# Altium PCB PCBv2.PcbDoc (part 2 of 2)
Units mil, origin at the board's own origin, x right, y up, seen from the top; angles counter-clockwise.
Board outline 3700.79 x 5244.09 mil, 2 copper layers (Top Layer, Bottom Layer); 35 components, 39 nets, 108 pads, 2885 vias.
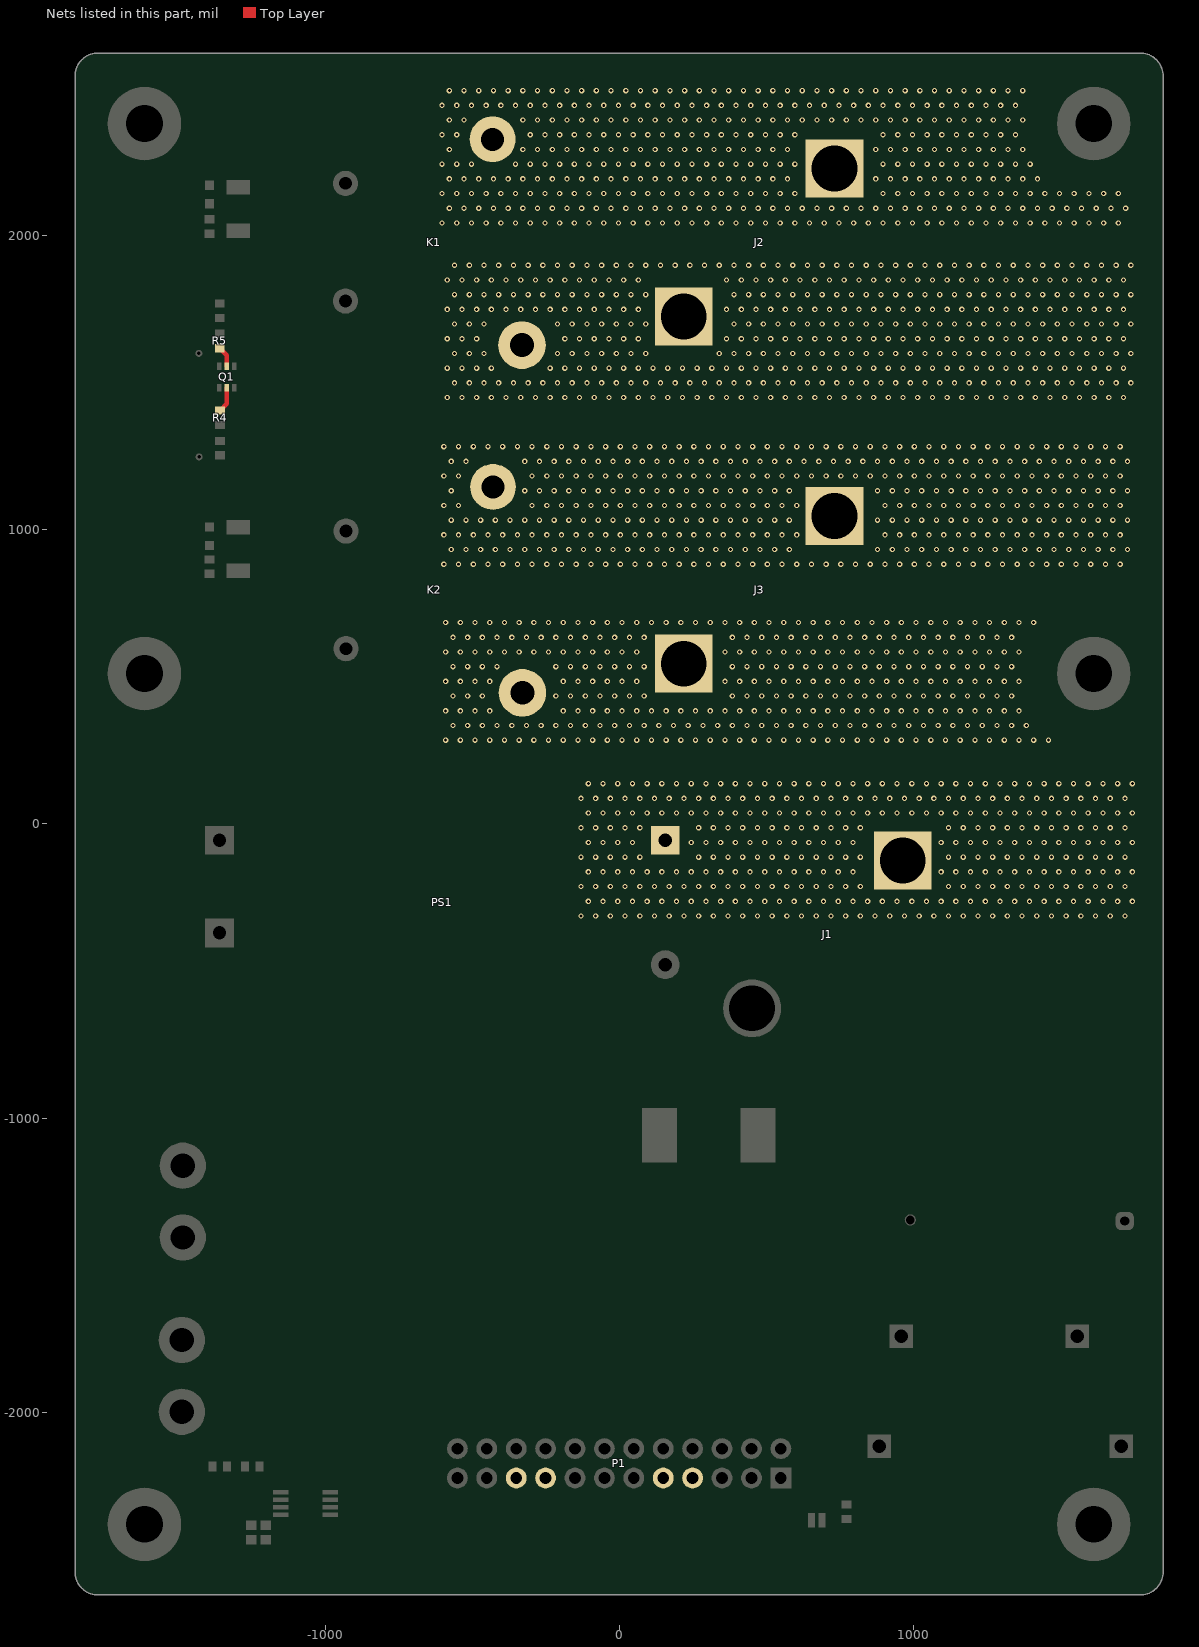
[diagram p2: the nets of this part, all layers, seen from the top]

## Via types
v1: diameter 18, hole 10, Top Layer to Bottom Layer, tented both sides, 2885 vias

## Nets (pads, with @x,y where several pads share a name; then routed paths per layer and width w, separated by ;. In a path a pad name is that pad's centre, name@x,y a point inside that pad or via, vN(x,y) a via of type N, cw(c..) or ccw(c..) an arc to the next point about the centre after c; other vN are vias at no path point) (continued)
NetJ1_2: J1.2 PS1.AC2
  other v1: -129.64,-312.84 -79.64,-312.84 -29.64,-312.84 20.36,-312.84 70.36,-312.84 120.36,-312.84 170.36,-312.84 220.36,-312.84 270.36,-312.84 320.36,-312.84 370.36,-312.84 420.36,-312.84 470.36,-312.84 520.36,-312.84 570.36,-312.84 620.36,-312.84 670.36,-312.84 720.36,-312.84 770.36,-312.84 820.36,-312.84 870.36,-312.84 920.36,-312.84 970.36,-312.84 1020.36,-312.84 1070.36,-312.84 1120.36,-312.84 1170.36,-312.84 1220.36,-312.84 1270.36,-312.84 1320.36,-312.84 1370.36,-312.84 1420.36,-312.84 1470.36,-312.84 1520.36,-312.84 1570.36,-312.84 1620.36,-312.84 1670.36,-312.84 1720.36,-312.84 -104.64,-262.84 -54.64,-262.84 -4.64,-262.84 45.36,-262.84 95.36,-262.84 145.36,-262.84 195.36,-262.84 245.36,-262.84 295.36,-262.84 345.36,-262.84 395.36,-262.84 445.36,-262.84 495.36,-262.84 545.36,-262.84 595.36,-262.84 645.36,-262.84 695.36,-262.84 745.36,-262.84 795.36,-262.84 845.36,-262.84 895.36,-262.84 945.36,-262.84 995.36,-262.84 1045.36,-262.84 1095.36,-262.84 1145.36,-262.84 1195.36,-262.84 1245.36,-262.84 1295.36,-262.84 1345.36,-262.84 1395.36,-262.84 1445.36,-262.84 1495.36,-262.84 1545.36,-262.84 1595.36,-262.84 1645.36,-262.84 1695.36,-262.84 1745.36,-262.84 -129.64,-212.84 -79.64,-212.84 -29.64,-212.84 20.36,-212.84 70.36,-212.84 120.36,-212.84 170.36,-212.84 220.36,-212.84 270.36,-212.84 320.36,-212.84 370.36,-212.84 420.36,-212.84 470.36,-212.84 520.36,-212.84 570.36,-212.84 620.36,-212.84 670.36,-212.84 720.36,-212.84 770.36,-212.84 820.36,-212.84 1120.36,-212.84 1170.36,-212.84 1220.36,-212.84 1270.36,-212.84 1320.36,-212.84 1370.36,-212.84 1420.36,-212.84 1470.36,-212.84 1520.36,-212.84 1570.36,-212.84 1620.36,-212.84 1670.36,-212.84 1720.36,-212.84 -104.64,-162.84 -54.64,-162.84 -4.64,-162.84 45.36,-162.84 95.36,-162.84 145.36,-162.84 195.36,-162.84 245.36,-162.84 295.36,-162.84 345.36,-162.84 395.36,-162.84 445.36,-162.84 495.36,-162.84 545.36,-162.84 595.36,-162.84 645.36,-162.84 695.36,-162.84 745.36,-162.84 795.36,-162.84 1095.36,-162.84 1145.36,-162.84 1195.36,-162.84 1245.36,-162.84 1295.36,-162.84 1345.36,-162.84 1395.36,-162.84 1445.36,-162.84 1495.36,-162.84 1545.36,-162.84 1595.36,-162.84 1645.36,-162.84 1695.36,-162.84 1745.36,-162.84 -129.64,-112.84 -79.64,-112.84 -29.64,-112.84 20.36,-112.84 70.36,-112.84 270.36,-112.84 320.36,-112.84 370.36,-112.84 420.36,-112.84 470.36,-112.84 520.36,-112.84 570.36,-112.84 620.36,-112.84 670.36,-112.84 720.36,-112.84 770.36,-112.84 820.36,-112.84 1120.36,-112.84 1170.36,-112.84 1220.36,-112.84 1270.36,-112.84 1320.36,-112.84 1370.36,-112.84 1420.36,-112.84 1470.36,-112.84 1520.36,-112.84 1570.36,-112.84 1620.36,-112.84 1670.36,-112.84 1720.36,-112.84 -104.64,-62.84 -54.64,-62.84 -4.64,-62.84 45.36,-62.84 245.36,-62.84 295.36,-62.84 345.36,-62.84 395.36,-62.84 445.36,-62.84 495.36,-62.84 545.36,-62.84 595.36,-62.84 645.36,-62.84 695.36,-62.84 745.36,-62.84 795.36,-62.84 1095.36,-62.84 1145.36,-62.84 1195.36,-62.84 1245.36,-62.84 1295.36,-62.84 1345.36,-62.84 1395.36,-62.84 1445.36,-62.84 1495.36,-62.84 1545.36,-62.84 1595.36,-62.84 1645.36,-62.84 1695.36,-62.84 1745.36,-62.84 -129.64,-12.84 -79.64,-12.84 -29.64,-12.84 20.36,-12.84 70.36,-12.84 270.36,-12.84 320.36,-12.84 370.36,-12.84 420.36,-12.84 470.36,-12.84 520.36,-12.84 570.36,-12.84 620.36,-12.84 670.36,-12.84 720.36,-12.84 770.36,-12.84 820.36,-12.84 1120.36,-12.84 1170.36,-12.84 1220.36,-12.84 1270.36,-12.84 1320.36,-12.84 1370.36,-12.84 1420.36,-12.84 1470.36,-12.84 1520.36,-12.84 1570.36,-12.84 1620.36,-12.84 1670.36,-12.84 1720.36,-12.84 -104.64,37.16 -54.64,37.16 -4.64,37.16 45.36,37.16 95.36,37.16 145.36,37.16 195.36,37.16 245.36,37.16 295.36,37.16 345.36,37.16 395.36,37.16 445.36,37.16 495.36,37.16 545.36,37.16 595.36,37.16 645.36,37.16 695.36,37.16 745.36,37.16 795.36,37.16 845.36,37.16 895.36,37.16 945.36,37.16 995.36,37.16 1045.36,37.16 1095.36,37.16 1145.36,37.16 1195.36,37.16 1245.36,37.16 1295.36,37.16 1345.36,37.16 1395.36,37.16 1445.36,37.16 1495.36,37.16 1545.36,37.16 1595.36,37.16 1645.36,37.16 1695.36,37.16 1745.36,37.16 -129.64,87.16 -79.64,87.16 -29.64,87.16 20.36,87.16 70.36,87.16 120.36,87.16 170.36,87.16 220.36,87.16 270.36,87.16 320.36,87.16 370.36,87.16 420.36,87.16 470.36,87.16 520.36,87.16 570.36,87.16 620.36,87.16 670.36,87.16 720.36,87.16 770.36,87.16 820.36,87.16 870.36,87.16 920.36,87.16 970.36,87.16 1020.36,87.16 1070.36,87.16 1120.36,87.16 1170.36,87.16 1220.36,87.16 1270.36,87.16 1320.36,87.16 1370.36,87.16 1420.36,87.16 1470.36,87.16 1520.36,87.16 1570.36,87.16 1620.36,87.16 1670.36,87.16 1720.36,87.16 -104.64,137.16 -54.64,137.16 -4.64,137.16 45.36,137.16 95.36,137.16 145.36,137.16 195.36,137.16 245.36,137.16 295.36,137.16 345.36,137.16 395.36,137.16 445.36,137.16 495.36,137.16 545.36,137.16 595.36,137.16 645.36,137.16 695.36,137.16 745.36,137.16 795.36,137.16 845.36,137.16 895.36,137.16 945.36,137.16 995.36,137.16 1045.36,137.16 1095.36,137.16 1145.36,137.16 1195.36,137.16 1245.36,137.16 1295.36,137.16 1345.36,137.16 1395.36,137.16 1445.36,137.16 1495.36,137.16 1545.36,137.16 1595.36,137.16 1645.36,137.16 1695.36,137.16 1745.36,137.16
NetJ2_1: J2.1 K1.1
  other v1: -584.5,1450.32 -534.5,1450.32 -484.5,1450.32 -434.5,1450.32 -384.5,1450.32 -334.5,1450.32 -284.5,1450.32 -234.5,1450.32 -184.5,1450.32 -134.5,1450.32 -84.5,1450.32 -34.5,1450.32 15.5,1450.32 65.5,1450.32 115.5,1450.32 165.5,1450.32 215.5,1450.32 265.5,1450.32 315.5,1450.32 365.5,1450.32 415.5,1450.32 465.5,1450.32 515.5,1450.32 565.5,1450.32 615.5,1450.32 665.5,1450.32 715.5,1450.32 765.5,1450.32 815.5,1450.32 865.5,1450.32 915.5,1450.32 965.5,1450.32 1015.5,1450.32 1065.5,1450.32 1115.5,1450.32 1165.5,1450.32 1215.5,1450.32 1265.5,1450.32 1315.5,1450.32 1365.5,1450.32 1415.5,1450.32 1465.5,1450.32 1515.5,1450.32 1565.5,1450.32 1615.5,1450.32 1665.5,1450.32 1715.5,1450.32 -559.5,1500.32 -509.5,1500.32 -459.5,1500.32 -409.5,1500.32 -359.5,1500.32 -309.5,1500.32 -259.5,1500.32 -209.5,1500.32 -159.5,1500.32 -109.5,1500.32 -59.5,1500.32 -9.5,1500.32 40.5,1500.32 90.5,1500.32 140.5,1500.32 190.5,1500.32 240.5,1500.32 290.5,1500.32 340.5,1500.32 390.5,1500.32 440.5,1500.32 490.5,1500.32 540.5,1500.32 590.5,1500.32 640.5,1500.32 690.5,1500.32 740.5,1500.32 790.5,1500.32 840.5,1500.32 890.5,1500.32 940.5,1500.32 990.5,1500.32 1040.5,1500.32 1090.5,1500.32 1140.5,1500.32 1190.5,1500.32 1240.5,1500.32 1290.5,1500.32 1340.5,1500.32 1390.5,1500.32 1440.5,1500.32 1490.5,1500.32 1540.5,1500.32 1590.5,1500.32 1640.5,1500.32 1690.5,1500.32 1740.5,1500.32 -584.5,1550.32 -534.5,1550.32 -484.5,1550.32 -434.5,1550.32 -234.5,1550.32 -184.5,1550.32 -134.5,1550.32 -84.5,1550.32 -34.5,1550.32 15.5,1550.32 65.5,1550.32 115.5,1550.32 165.5,1550.32 215.5,1550.32 265.5,1550.32 315.5,1550.32 365.5,1550.32 415.5,1550.32 465.5,1550.32 515.5,1550.32 565.5,1550.32 615.5,1550.32 665.5,1550.32 715.5,1550.32 765.5,1550.32 815.5,1550.32 865.5,1550.32 915.5,1550.32 965.5,1550.32 1015.5,1550.32 1065.5,1550.32 1115.5,1550.32 1165.5,1550.32 1215.5,1550.32 1265.5,1550.32 1315.5,1550.32 1365.5,1550.32 1415.5,1550.32 1465.5,1550.32 1515.5,1550.32 1565.5,1550.32 1615.5,1550.32 1665.5,1550.32 1715.5,1550.32 -559.5,1600.32 -509.5,1600.32 -459.5,1600.32 -209.5,1600.32 -159.5,1600.32 -109.5,1600.32 -59.5,1600.32 -9.5,1600.32 40.5,1600.32 90.5,1600.32 340.5,1600.32 390.5,1600.32 440.5,1600.32 490.5,1600.32 540.5,1600.32 590.5,1600.32 640.5,1600.32 690.5,1600.32 740.5,1600.32 790.5,1600.32 840.5,1600.32 890.5,1600.32 940.5,1600.32 990.5,1600.32 1040.5,1600.32 1090.5,1600.32 1140.5,1600.32 1190.5,1600.32 1240.5,1600.32 1290.5,1600.32 1340.5,1600.32 1390.5,1600.32 1440.5,1600.32 1490.5,1600.32 1540.5,1600.32 1590.5,1600.32 1640.5,1600.32 1690.5,1600.32 1740.5,1600.32 -584.5,1650.32 -534.5,1650.32 -484.5,1650.32 -184.5,1650.32 -134.5,1650.32 -84.5,1650.32 -34.5,1650.32 15.5,1650.32 65.5,1650.32 365.5,1650.32 415.5,1650.32 465.5,1650.32 515.5,1650.32 565.5,1650.32 615.5,1650.32 665.5,1650.32 715.5,1650.32 765.5,1650.32 815.5,1650.32 865.5,1650.32 915.5,1650.32 965.5,1650.32 1015.5,1650.32 1065.5,1650.32 1115.5,1650.32 1165.5,1650.32 1215.5,1650.32 1265.5,1650.32 1315.5,1650.32 1365.5,1650.32 1415.5,1650.32 1465.5,1650.32 1515.5,1650.32 1565.5,1650.32 1615.5,1650.32 1665.5,1650.32 1715.5,1650.32 -559.5,1700.32 -509.5,1700.32 -459.5,1700.32 -209.5,1700.32 -159.5,1700.32 -109.5,1700.32 -59.5,1700.32 -9.5,1700.32 40.5,1700.32 90.5,1700.32 390.5,1700.32 440.5,1700.32 490.5,1700.32 540.5,1700.32 590.5,1700.32 640.5,1700.32 690.5,1700.32 740.5,1700.32 790.5,1700.32 840.5,1700.32 890.5,1700.32 940.5,1700.32 990.5,1700.32 1040.5,1700.32 1090.5,1700.32 1140.5,1700.32 1190.5,1700.32 1240.5,1700.32 1290.5,1700.32 1340.5,1700.32 1390.5,1700.32 1440.5,1700.32 1490.5,1700.32 1540.5,1700.32 1590.5,1700.32 1640.5,1700.32 1690.5,1700.32 1740.5,1700.32 -584.5,1750.32 -534.5,1750.32 -484.5,1750.32 -434.5,1750.32 -384.5,1750.32 -334.5,1750.32 -284.5,1750.32 -234.5,1750.32 -184.5,1750.32 -134.5,1750.32 -84.5,1750.32 -34.5,1750.32 15.5,1750.32 65.5,1750.32 365.5,1750.32 415.5,1750.32 465.5,1750.32 515.5,1750.32 565.5,1750.32 615.5,1750.32 665.5,1750.32 715.5,1750.32 765.5,1750.32 815.5,1750.32 865.5,1750.32 915.5,1750.32 965.5,1750.32 1015.5,1750.32 1065.5,1750.32 1115.5,1750.32 1165.5,1750.32 1215.5,1750.32 1265.5,1750.32 1315.5,1750.32 1365.5,1750.32 1415.5,1750.32 1465.5,1750.32 1515.5,1750.32 1565.5,1750.32 1615.5,1750.32 1665.5,1750.32 1715.5,1750.32 -559.5,1800.32 -509.5,1800.32 -459.5,1800.32 -409.5,1800.32 -359.5,1800.32 -309.5,1800.32 -259.5,1800.32 -209.5,1800.32 -159.5,1800.32 -109.5,1800.32 -59.5,1800.32 -9.5,1800.32 40.5,1800.32 90.5,1800.32 390.5,1800.32 440.5,1800.32 490.5,1800.32 540.5,1800.32 590.5,1800.32 640.5,1800.32 690.5,1800.32 740.5,1800.32 790.5,1800.32 840.5,1800.32 890.5,1800.32 940.5,1800.32 990.5,1800.32 1040.5,1800.32 1090.5,1800.32 1140.5,1800.32 1190.5,1800.32 1240.5,1800.32 1290.5,1800.32 1340.5,1800.32 1390.5,1800.32 1440.5,1800.32 1490.5,1800.32 1540.5,1800.32 1590.5,1800.32 1640.5,1800.32 1690.5,1800.32 1740.5,1800.32 -584.5,1850.32 -534.5,1850.32 -484.5,1850.32 -434.5,1850.32 -384.5,1850.32 -334.5,1850.32 -284.5,1850.32 -234.5,1850.32 -184.5,1850.32 -134.5,1850.32 -84.5,1850.32 -34.5,1850.32 15.5,1850.32 65.5,1850.32 365.5,1850.32 415.5,1850.32 465.5,1850.32 515.5,1850.32 565.5,1850.32 615.5,1850.32 665.5,1850.32 715.5,1850.32 765.5,1850.32 815.5,1850.32 865.5,1850.32 915.5,1850.32 965.5,1850.32 1015.5,1850.32 1065.5,1850.32 1115.5,1850.32 1165.5,1850.32 1215.5,1850.32 1265.5,1850.32 1315.5,1850.32 1365.5,1850.32 1415.5,1850.32 1465.5,1850.32 1515.5,1850.32 1565.5,1850.32 1615.5,1850.32 1665.5,1850.32 1715.5,1850.32 -559.5,1900.32 -509.5,1900.32 -459.5,1900.32 -409.5,1900.32 -359.5,1900.32 -309.5,1900.32 -259.5,1900.32 -209.5,1900.32 -159.5,1900.32 -109.5,1900.32 -59.5,1900.32 -9.5,1900.32 40.5,1900.32 90.5,1900.32 140.5,1900.32 190.5,1900.32 240.5,1900.32 290.5,1900.32 340.5,1900.32 390.5,1900.32 440.5,1900.32 490.5,1900.32 540.5,1900.32 590.5,1900.32 640.5,1900.32 690.5,1900.32 740.5,1900.32 790.5,1900.32 840.5,1900.32 890.5,1900.32 940.5,1900.32 990.5,1900.32 1040.5,1900.32 1090.5,1900.32 1140.5,1900.32 1190.5,1900.32 1240.5,1900.32 1290.5,1900.32 1340.5,1900.32 1390.5,1900.32 1440.5,1900.32 1490.5,1900.32 1540.5,1900.32 1590.5,1900.32 1640.5,1900.32 1690.5,1900.32 1740.5,1900.32
NetJ2_2: J2.2 K1.2
  other v1: -602.26,2044.12 -552.26,2044.12 -502.26,2044.12 -452.26,2044.12 -402.26,2044.12 -352.26,2044.12 -302.26,2044.12 -252.26,2044.12 -202.26,2044.12 -152.26,2044.12 -102.26,2044.12 -52.26,2044.12 -2.26,2044.12 47.74,2044.12 97.74,2044.12 147.74,2044.12 197.74,2044.12 247.74,2044.12 297.74,2044.12 347.74,2044.12 397.74,2044.12 447.74,2044.12 497.74,2044.12 547.74,2044.12 597.74,2044.12 647.74,2044.12 697.74,2044.12 747.74,2044.12 797.74,2044.12 847.74,2044.12 897.74,2044.12 947.74,2044.12 997.74,2044.12 1047.74,2044.12 1097.74,2044.12 1147.74,2044.12 1197.74,2044.12 1247.74,2044.12 1297.74,2044.12 1347.74,2044.12 1397.74,2044.12 1447.74,2044.12 1497.74,2044.12 1547.74,2044.12 1597.74,2044.12 1647.74,2044.12 1697.74,2044.12 -577.26,2094.12 -527.26,2094.12 -477.26,2094.12 -427.26,2094.12 -377.26,2094.12 -327.26,2094.12 -277.26,2094.12 -227.26,2094.12 -177.26,2094.12 -127.26,2094.12 -77.26,2094.12 -27.26,2094.12 22.74,2094.12 72.74,2094.12 122.74,2094.12 172.74,2094.12 222.74,2094.12 272.74,2094.12 322.74,2094.12 372.74,2094.12 422.74,2094.12 472.74,2094.12 522.74,2094.12 572.74,2094.12 622.74,2094.12 672.74,2094.12 722.74,2094.12 772.74,2094.12 822.74,2094.12 872.74,2094.12 922.74,2094.12 972.74,2094.12 1022.74,2094.12 1072.74,2094.12 1122.74,2094.12 1172.74,2094.12 1222.74,2094.12 1272.74,2094.12 1322.74,2094.12 1372.74,2094.12 1422.74,2094.12 1472.74,2094.12 1522.74,2094.12 1572.74,2094.12 1622.74,2094.12 1672.74,2094.12 1722.74,2094.12 -602.26,2144.12 -552.26,2144.12 -502.26,2144.12 -452.26,2144.12 -402.26,2144.12 -352.26,2144.12 -302.26,2144.12 -252.26,2144.12 -202.26,2144.12 -152.26,2144.12 -102.26,2144.12 -52.26,2144.12 -2.26,2144.12 47.74,2144.12 97.74,2144.12 147.74,2144.12 197.74,2144.12 247.74,2144.12 297.74,2144.12 347.74,2144.12 397.74,2144.12 447.74,2144.12 497.74,2144.12 547.74,2144.12 597.74,2144.12 897.74,2144.12 947.74,2144.12 997.74,2144.12 1047.74,2144.12 1097.74,2144.12 1147.74,2144.12 1197.74,2144.12 1247.74,2144.12 1297.74,2144.12 1347.74,2144.12 1397.74,2144.12 1447.74,2144.12 1497.74,2144.12 1547.74,2144.12 1597.74,2144.12 1647.74,2144.12 1697.74,2144.12 -577.26,2194.12 -527.26,2194.12 -477.26,2194.12 -427.26,2194.12 -377.26,2194.12 -327.26,2194.12 -277.26,2194.12 -227.26,2194.12 -177.26,2194.12 -127.26,2194.12 -77.26,2194.12 -27.26,2194.12 22.74,2194.12 72.74,2194.12 122.74,2194.12 172.74,2194.12 222.74,2194.12 272.74,2194.12 322.74,2194.12 372.74,2194.12 422.74,2194.12 472.74,2194.12 522.74,2194.12 572.74,2194.12 872.74,2194.12 922.74,2194.12 972.74,2194.12 1022.74,2194.12 1072.74,2194.12 1122.74,2194.12 1172.74,2194.12 1222.74,2194.12 1272.74,2194.12 1322.74,2194.12 1372.74,2194.12 1422.74,2194.12 -602.26,2244.12 -552.26,2244.12 -502.26,2244.12 -352.26,2244.12 -302.26,2244.12 -252.26,2244.12 -202.26,2244.12 -152.26,2244.12 -102.26,2244.12 -52.26,2244.12 -2.26,2244.12 47.74,2244.12 97.74,2244.12 147.74,2244.12 197.74,2244.12 247.74,2244.12 297.74,2244.12 347.74,2244.12 397.74,2244.12 447.74,2244.12 497.74,2244.12 547.74,2244.12 597.74,2244.12 897.74,2244.12 947.74,2244.12 997.74,2244.12 1047.74,2244.12 1097.74,2244.12 1147.74,2244.12 1197.74,2244.12 1247.74,2244.12 1297.74,2244.12 1347.74,2244.12 1397.74,2244.12 -577.26,2294.12 -327.26,2294.12 -277.26,2294.12 -227.26,2294.12 -177.26,2294.12 -127.26,2294.12 -77.26,2294.12 -27.26,2294.12 22.74,2294.12 72.74,2294.12 122.74,2294.12 172.74,2294.12 222.74,2294.12 272.74,2294.12 322.74,2294.12 372.74,2294.12 422.74,2294.12 472.74,2294.12 522.74,2294.12 572.74,2294.12 872.74,2294.12 922.74,2294.12 972.74,2294.12 1022.74,2294.12 1072.74,2294.12 1122.74,2294.12 1172.74,2294.12 1222.74,2294.12 1272.74,2294.12 1322.74,2294.12 1372.74,2294.12 -602.26,2344.12 -552.26,2344.12 -302.26,2344.12 -252.26,2344.12 -202.26,2344.12 -152.26,2344.12 -102.26,2344.12 -52.26,2344.12 -2.26,2344.12 47.74,2344.12 97.74,2344.12 147.74,2344.12 197.74,2344.12 247.74,2344.12 297.74,2344.12 347.74,2344.12 397.74,2344.12 447.74,2344.12 497.74,2344.12 547.74,2344.12 597.74,2344.12 897.74,2344.12 947.74,2344.12 997.74,2344.12 1047.74,2344.12 1097.74,2344.12 1147.74,2344.12 1197.74,2344.12 1247.74,2344.12 1297.74,2344.12 1347.74,2344.12 -577.26,2394.12 -527.26,2394.12 -327.26,2394.12 -277.26,2394.12 -227.26,2394.12 -177.26,2394.12 -127.26,2394.12 -77.26,2394.12 -27.26,2394.12 22.74,2394.12 72.74,2394.12 122.74,2394.12 172.74,2394.12 222.74,2394.12 272.74,2394.12 322.74,2394.12 372.74,2394.12 422.74,2394.12 472.74,2394.12 522.74,2394.12 572.74,2394.12 622.74,2394.12 672.74,2394.12 722.74,2394.12 772.74,2394.12 822.74,2394.12 872.74,2394.12 922.74,2394.12 972.74,2394.12 1022.74,2394.12 1072.74,2394.12 1122.74,2394.12 1172.74,2394.12 1222.74,2394.12 1272.74,2394.12 1322.74,2394.12 1372.74,2394.12 -602.26,2444.12 -552.26,2444.12 -502.26,2444.12 -452.26,2444.12 -402.26,2444.12 -352.26,2444.12 -302.26,2444.12 -252.26,2444.12 -202.26,2444.12 -152.26,2444.12 -102.26,2444.12 -52.26,2444.12 -2.26,2444.12 47.74,2444.12 97.74,2444.12 147.74,2444.12 197.74,2444.12 247.74,2444.12 297.74,2444.12 347.74,2444.12 397.74,2444.12 447.74,2444.12 497.74,2444.12 547.74,2444.12 597.74,2444.12 647.74,2444.12 697.74,2444.12 747.74,2444.12 797.74,2444.12 847.74,2444.12 897.74,2444.12 947.74,2444.12 997.74,2444.12 1047.74,2444.12 1097.74,2444.12 1147.74,2444.12 1197.74,2444.12 1247.74,2444.12 1297.74,2444.12 1347.74,2444.12 -577.26,2494.12 -527.26,2494.12 -477.26,2494.12 -427.26,2494.12 -377.26,2494.12 -327.26,2494.12 -277.26,2494.12 -227.26,2494.12 -177.26,2494.12 -127.26,2494.12 -77.26,2494.12 -27.26,2494.12 22.74,2494.12 72.74,2494.12 122.74,2494.12 172.74,2494.12 222.74,2494.12 272.74,2494.12 322.74,2494.12 372.74,2494.12 422.74,2494.12 472.74,2494.12 522.74,2494.12 572.74,2494.12 622.74,2494.12 672.74,2494.12 722.74,2494.12 772.74,2494.12 822.74,2494.12 872.74,2494.12 922.74,2494.12 972.74,2494.12 1022.74,2494.12 1072.74,2494.12 1122.74,2494.12 1172.74,2494.12 1222.74,2494.12 1272.74,2494.12 1322.74,2494.12 1372.74,2494.12
NetJ3_1: J3.1 K2.1
  other v1: -590,285 -540,285 -490,285 -440,285 -390,285 -340,285 -290,285 -240,285 -190,285 -140,285 -90,285 -40,285 10,285 60,285 110,285 160,285 210,285 260,285 310,285 360,285 410,285 460,285 510,285 560,285 610,285 660,285 710,285 760,285 810,285 860,285 910,285 960,285 1010,285 1060,285 1110,285 1160,285 1210,285 1260,285 1310,285 1360,285 1410,285 1460,285 -565,335 -515,335 -465,335 -415,335 -365,335 -315,335 -265,335 -215,335 -165,335 -115,335 -65,335 -15,335 35,335 85,335 135,335 185,335 235,335 285,335 335,335 385,335 435,335 485,335 535,335 585,335 635,335 685,335 735,335 785,335 835,335 885,335 935,335 985,335 1035,335 1085,335 1135,335 1185,335 1235,335 1285,335 1335,335 1385,335 -590,385 -540,385 -490,385 -440,385 -190,385 -140,385 -90,385 -40,385 10,385 60,385 110,385 160,385 210,385 260,385 310,385 360,385 410,385 460,385 510,385 560,385 610,385 660,385 710,385 760,385 810,385 860,385 910,385 960,385 1010,385 1060,385 1110,385 1160,385 1210,385 1260,385 1310,385 1360,385 -565,435 -515,435 -465,435 -215,435 -165,435 -115,435 -65,435 -15,435 35,435 85,435 385,435 435,435 485,435 535,435 585,435 635,435 685,435 735,435 785,435 835,435 885,435 935,435 985,435 1035,435 1085,435 1135,435 1185,435 1235,435 1285,435 1335,435 -590,485 -540,485 -490,485 -440,485 -190,485 -140,485 -90,485 -40,485 10,485 60,485 360,485 410,485 460,485 510,485 560,485 610,485 660,485 710,485 760,485 810,485 860,485 910,485 960,485 1010,485 1060,485 1110,485 1160,485 1210,485 1260,485 1310,485 1360,485 -565,535 -515,535 -465,535 -415,535 -215,535 -165,535 -115,535 -65,535 -15,535 35,535 85,535 385,535 435,535 485,535 535,535 585,535 635,535 685,535 735,535 785,535 835,535 885,535 935,535 985,535 1035,535 1085,535 1135,535 1185,535 1235,535 1285,535 1335,535 -590,585 -540,585 -490,585 -440,585 -390,585 -340,585 -290,585 -240,585 -190,585 -140,585 -90,585 -40,585 10,585 60,585 360,585 410,585 460,585 510,585 560,585 610,585 660,585 710,585 760,585 810,585 860,585 910,585 960,585 1010,585 1060,585 1110,585 1160,585 1210,585 1260,585 1310,585 1360,585 -565,635 -515,635 -465,635 -415,635 -365,635 -315,635 -265,635 -215,635 -165,635 -115,635 -65,635 -15,635 35,635 85,635 385,635 435,635 485,635 535,635 585,635 635,635 685,635 735,635 785,635 835,635 885,635 935,635 985,635 1035,635 1085,635 1135,635 1185,635 1235,635 1285,635 1335,635 -590,685 -540,685 -490,685 -440,685 -390,685 -340,685 -290,685 -240,685 -190,685 -140,685 -90,685 -40,685 10,685 60,685 110,685 160,685 210,685 260,685 310,685 360,685 410,685 460,685 510,685 560,685 610,685 660,685 710,685 760,685 810,685 860,685 910,685 960,685 1010,685 1060,685 1110,685 1160,685 1210,685 1260,685 1310,685 1360,685 1410,685
NetJ3_2: J3.2 K2.2
  other v1: -595.92,883.35 -545.92,883.35 -495.92,883.35 -445.92,883.35 -395.92,883.35 -345.92,883.35 -295.92,883.35 -245.92,883.35 -195.92,883.35 -145.92,883.35 -95.92,883.35 -45.92,883.35 4.08,883.35 54.08,883.35 104.08,883.35 154.08,883.35 204.08,883.35 254.08,883.35 304.08,883.35 354.08,883.35 404.08,883.35 454.08,883.35 504.08,883.35 554.08,883.35 604.08,883.35 654.08,883.35 704.08,883.35 754.08,883.35 804.08,883.35 854.08,883.35 904.08,883.35 954.08,883.35 1004.08,883.35 1054.08,883.35 1104.08,883.35 1154.08,883.35 1204.08,883.35 1254.08,883.35 1304.08,883.35 1354.08,883.35 1404.08,883.35 1454.08,883.35 1504.08,883.35 1554.08,883.35 1604.08,883.35 1654.08,883.35 1704.08,883.35 -570.92,933.35 -520.92,933.35 -470.92,933.35 -420.92,933.35 -370.92,933.35 -320.92,933.35 -270.92,933.35 -220.92,933.35 -170.92,933.35 -120.92,933.35 -70.92,933.35 -20.92,933.35 29.08,933.35 79.08,933.35 129.08,933.35 179.08,933.35 229.08,933.35 279.08,933.35 329.08,933.35 379.08,933.35 429.08,933.35 479.08,933.35 529.08,933.35 579.08,933.35 879.08,933.35 929.08,933.35 979.08,933.35 1029.08,933.35 1079.08,933.35 1129.08,933.35 1179.08,933.35 1229.08,933.35 1279.08,933.35 1329.08,933.35 1379.08,933.35 1429.08,933.35 1479.08,933.35 1529.08,933.35 1579.08,933.35 1629.08,933.35 1679.08,933.35 1729.08,933.35 -595.92,983.35 -545.92,983.35 -495.92,983.35 -445.92,983.35 -395.92,983.35 -345.92,983.35 -295.92,983.35 -245.92,983.35 -195.92,983.35 -145.92,983.35 -95.92,983.35 -45.92,983.35 4.08,983.35 54.08,983.35 104.08,983.35 154.08,983.35 204.08,983.35 254.08,983.35 304.08,983.35 354.08,983.35 404.08,983.35 454.08,983.35 504.08,983.35 554.08,983.35 604.08,983.35 904.08,983.35 954.08,983.35 1004.08,983.35 1054.08,983.35 1104.08,983.35 1154.08,983.35 1204.08,983.35 1254.08,983.35 1304.08,983.35 1354.08,983.35 1404.08,983.35 1454.08,983.35 1504.08,983.35 1554.08,983.35 1604.08,983.35 1654.08,983.35 1704.08,983.35 -570.92,1033.35 -520.92,1033.35 -470.92,1033.35 -420.92,1033.35 -370.92,1033.35 -320.92,1033.35 -270.92,1033.35 -220.92,1033.35 -170.92,1033.35 -120.92,1033.35 -70.92,1033.35 -20.92,1033.35 29.08,1033.35 79.08,1033.35 129.08,1033.35 179.08,1033.35 229.08,1033.35 279.08,1033.35 329.08,1033.35 379.08,1033.35 429.08,1033.35 479.08,1033.35 529.08,1033.35 579.08,1033.35 879.08,1033.35 929.08,1033.35 979.08,1033.35 1029.08,1033.35 1079.08,1033.35 1129.08,1033.35 1179.08,1033.35 1229.08,1033.35 1279.08,1033.35 1329.08,1033.35 1379.08,1033.35 1429.08,1033.35 1479.08,1033.35 1529.08,1033.35 1579.08,1033.35 1629.08,1033.35 1679.08,1033.35 1729.08,1033.35 -595.92,1083.35 -545.92,1083.35 -295.92,1083.35 -245.92,1083.35 -195.92,1083.35 -145.92,1083.35 -95.92,1083.35 -45.92,1083.35 4.08,1083.35 54.08,1083.35 104.08,1083.35 154.08,1083.35 204.08,1083.35 254.08,1083.35 304.08,1083.35 354.08,1083.35 404.08,1083.35 454.08,1083.35 504.08,1083.35 554.08,1083.35 604.08,1083.35 904.08,1083.35 954.08,1083.35 1004.08,1083.35 1054.08,1083.35 1104.08,1083.35 1154.08,1083.35 1204.08,1083.35 1254.08,1083.35 1304.08,1083.35 1354.08,1083.35 1404.08,1083.35 1454.08,1083.35 1504.08,1083.35 1554.08,1083.35 1604.08,1083.35 1654.08,1083.35 1704.08,1083.35 -570.92,1133.35 -320.92,1133.35 -270.92,1133.35 -220.92,1133.35 -170.92,1133.35 -120.92,1133.35 -70.92,1133.35 -20.92,1133.35 29.08,1133.35 79.08,1133.35 129.08,1133.35 179.08,1133.35 229.08,1133.35 279.08,1133.35 329.08,1133.35 379.08,1133.35 429.08,1133.35 479.08,1133.35 529.08,1133.35 579.08,1133.35 879.08,1133.35 929.08,1133.35 979.08,1133.35 1029.08,1133.35 1079.08,1133.35 1129.08,1133.35 1179.08,1133.35 1229.08,1133.35 1279.08,1133.35 1329.08,1133.35 1379.08,1133.35 1429.08,1133.35 1479.08,1133.35 1529.08,1133.35 1579.08,1133.35 1629.08,1133.35 1679.08,1133.35 1729.08,1133.35 -595.92,1183.35 -545.92,1183.35 -295.92,1183.35 -245.92,1183.35 -195.92,1183.35 -145.92,1183.35 -95.92,1183.35 -45.92,1183.35 4.08,1183.35 54.08,1183.35 104.08,1183.35 154.08,1183.35 204.08,1183.35 254.08,1183.35 304.08,1183.35 354.08,1183.35 404.08,1183.35 454.08,1183.35 504.08,1183.35 554.08,1183.35 604.08,1183.35 654.08,1183.35 704.08,1183.35 754.08,1183.35 804.08,1183.35 854.08,1183.35 904.08,1183.35 954.08,1183.35 1004.08,1183.35 1054.08,1183.35 1104.08,1183.35 1154.08,1183.35 1204.08,1183.35 1254.08,1183.35 1304.08,1183.35 1354.08,1183.35 1404.08,1183.35 1454.08,1183.35 1504.08,1183.35 1554.08,1183.35 1604.08,1183.35 1654.08,1183.35 1704.08,1183.35 -570.92,1233.35 -520.92,1233.35 -320.92,1233.35 -270.92,1233.35 -220.92,1233.35 -170.92,1233.35 -120.92,1233.35 -70.92,1233.35 -20.92,1233.35 29.08,1233.35 79.08,1233.35 129.08,1233.35 179.08,1233.35 229.08,1233.35 279.08,1233.35 329.08,1233.35 379.08,1233.35 429.08,1233.35 479.08,1233.35 529.08,1233.35 579.08,1233.35 629.08,1233.35 679.08,1233.35 729.08,1233.35 779.08,1233.35 829.08,1233.35 879.08,1233.35 929.08,1233.35 979.08,1233.35 1029.08,1233.35 1079.08,1233.35 1129.08,1233.35 1179.08,1233.35 1229.08,1233.35 1279.08,1233.35 1329.08,1233.35 1379.08,1233.35 1429.08,1233.35 1479.08,1233.35 1529.08,1233.35 1579.08,1233.35 1629.08,1233.35 1679.08,1233.35 1729.08,1233.35 -595.92,1283.35 -545.92,1283.35 -495.92,1283.35 -445.92,1283.35 -395.92,1283.35 -345.92,1283.35 -295.92,1283.35 -245.92,1283.35 -195.92,1283.35 -145.92,1283.35 -95.92,1283.35 -45.92,1283.35 4.08,1283.35 54.08,1283.35 104.08,1283.35 154.08,1283.35 204.08,1283.35 254.08,1283.35 304.08,1283.35 354.08,1283.35 404.08,1283.35 454.08,1283.35 504.08,1283.35 554.08,1283.35 604.08,1283.35 654.08,1283.35 704.08,1283.35 754.08,1283.35 804.08,1283.35 854.08,1283.35 904.08,1283.35 954.08,1283.35 1004.08,1283.35 1054.08,1283.35 1104.08,1283.35 1154.08,1283.35 1204.08,1283.35 1254.08,1283.35 1304.08,1283.35 1354.08,1283.35 1404.08,1283.35 1454.08,1283.35 1504.08,1283.35 1554.08,1283.35 1604.08,1283.35 1654.08,1283.35 1704.08,1283.35
NetQ1_2: Q1.2 R4.2 | length 87
  Top Layer w15: R4.2@-1357.09,1406.5 -1334.38,1429.21 Q1.2@-1334.38,1484.1
NetQ1_5: Q1.5 R5.2 | length 71.4
  Top Layer w15: R5.2@-1358.13,1618.05 -1334.38,1594.29 Q1.5@-1334.38,1556.46
RFU1: P1.17
RFU2: P1.19
RS4855_A: P1.9
RS4855_B: P1.7
pads on no net: CT1. H1.1 H2.1 H3.1 H4.1 H5.1 H6.1 U1.3

## Polygon pours and split planes (outlines as drawn)
GND on Top Layer "GND_L01_P116" (solid, pour order 116): -862.41,2621.67 -1771.68,2622.02 ccw(c-1771.71,2543.34) -1850.39,2543.34 -1850.39,-2543.01 ccw(c-1771.72,-2543.38) -1771.65,-2622.05 1794.02,-2618.86 ccw(c1771.6,-2543.34) 1850.38,-2543.32 1850.18,-1449.68 900.54,-1449.38 874.96,-1474.97 -274.99,-1474.89 -450.08,-1299.77 -450.04,-100.69 -474.95,-75.72 -800.52,-75.13 -824.96,-50.62 -824.73,149.98 -849.97,175.53 -862.82,188.43
NetJ2_1 on Top Layer "NETJ2_1_L01_P104" (solid, pour order 104): 1771.65,1421.85 -596.19,1421.85 cw(c-596.19,1471.07) -645.41,1471.07 -645.41,1884.45 cw(c-596.19,1884.45) -596.19,1933.66 1771.65,1933.66
NetJ3_1 on Top Layer "NETJ3_1_L01_P103" (solid, pour order 103): 1771.65,240.33 -592.09,240.33 cw(c-592.09,289.54) -641.3,289.54 -641.3,702.93 cw(c-592.09,702.93) -592.09,752.14 1771.65,752.14 1771.65,717.45 1524.48,717.45 ccw(c1524.48,584.92) 1391.95,584.92 1391.95,435.11 ccw(c1525.44,435.11) 1525.44,301.62 1771.65,301.62
NetJ3_2 on Top Layer "NETJ3_2_L01_P105" (solid, pour order 105): 1771.66,831.3 -596.19,831.3 cw(c-596.19,880.51) -645.41,880.51 -645.41,1293.9 cw(c-596.2,1293.9) -596.19,1343.11 1771.66,1343.11
NetJ2_2 on Top Layer "NETJ2_2_L01_P107" (solid, pour order 107): -596.2,2012.4 1387.61,2012.4 1771.65,2012.4 1771.65,2174.71 1525.47,2174.71 cw(c1525.47,2300.26) 1399.93,2300.26 1399.93,2524.21 -596.19,2524.22 ccw(c-596.2,2475.01) -645.41,2475 -645.41,2061.62 ccw(c-596.2,2061.61)
NetF1_1 on Top Layer "NETF1_1_L01_P106" (solid, pour order 106): 334.12,-468.7 334.11,-1137.99 ccw(c383.33,-1137.99) 383.33,-1187.21 1771.65,-1187.21 1771.65,-419.49 383.33,-419.49 ccw(c383.33,-468.7)
NetF1_2 on Top Layer "NETF1_2_L01_P101" (solid, pour order 101): 225.85,-399.8 -108.8,-399.8 ccw(c-108.8,-449.02) -158.01,-449.02 -158.01,-1137.99 ccw(c-108.8,-1137.99) -108.8,-1187.21 225.85,-1187.21 ccw(c225.85,-1137.99) 275.06,-1137.99 275.06,-449.02 ccw(c225.85,-449.02)
NetJ1_2 on Top Layer "NETJ1_2_L01_P102" (solid, pour order 102): 1771.65,-340.75 -108.8,-340.75 cw(c-108.8,-291.54) -158.01,-291.54 -158.01,121.85 cw(c-108.8,121.85) -108.8,171.06 1771.65,171.06
GND on Bottom Layer "GND_L02_P118" (solid, pour order 118): -862.41,2621.67 -1771.68,2622.02 ccw(c-1771.71,2543.34) -1850.39,2543.34 -1850.39,-2543.01 ccw(c-1771.72,-2543.38) -1771.65,-2622.05 1794.02,-2618.86 ccw(c1771.6,-2543.34) 1850.38,-2543.32 1850.18,-1449.68 900.54,-1449.38 874.96,-1474.97 -183.39,-1474.9 -450.08,-1208.18 -450.04,-100.69 -474.95,-75.72 -800.52,-75.13 -824.96,-50.62 -824.73,149.98 -849.97,175.53 -862.82,188.43
NetJ2_2 on Bottom Layer "NETJ2_2_L02_P108" (solid, pour order 108): -596.2,2012.4 1387.61,2012.4 1771.65,2012.4 1771.65,2174.71 1525.47,2174.71 cw(c1525.47,2300.26) 1399.93,2300.26 1399.93,2524.21 -596.19,2524.22 ccw(c-596.2,2475.01) -645.41,2475 -645.41,2061.62 ccw(c-596.2,2061.61)
NetJ2_1 on Bottom Layer "NETJ2_1_L02_P112" (solid, pour order 112): 1771.65,1421.85 -596.19,1421.85 cw(c-596.19,1471.07) -645.41,1471.07 -645.41,1884.45 cw(c-596.19,1884.45) -596.19,1933.66 1771.65,1933.66
NetJ3_1 on Bottom Layer "NETJ3_1_L02_P113" (solid, pour order 113): 1771.65,240.33 -592.09,240.33 cw(c-592.09,289.54) -641.3,289.54 -641.3,702.93 cw(c-592.09,702.93) -592.09,752.14 1771.65,752.14 1771.65,717.45 1524.48,717.45 ccw(c1524.48,584.92) 1391.95,584.92 1391.95,435.11 ccw(c1525.44,435.11) 1525.44,301.62 1771.65,301.62
NetJ3_2 on Bottom Layer "NETJ3_2_L02_P115" (solid, pour order 115): 1771.66,831.3 -596.19,831.3 cw(c-596.19,880.51) -645.41,880.51 -645.41,1293.9 cw(c-596.2,1293.9) -596.19,1343.11 1771.66,1343.11
NetF1_1 on Bottom Layer "NETF1_1_L02_P109" (solid, pour order 109): 334.12,-468.7 334.11,-1137.99 ccw(c383.33,-1137.99) 383.33,-1187.21 1771.65,-1187.21 1771.65,-419.49 383.33,-419.49 ccw(c383.33,-468.7)
NetF1_2 on Bottom Layer "NETF1_2_L02_P110" (solid, pour order 110): 225.85,-399.8 -108.8,-399.8 ccw(c-108.8,-449.02) -158.01,-449.02 -158.01,-1137.99 ccw(c-108.8,-1137.99) -108.8,-1187.21 225.85,-1187.21 ccw(c225.85,-1137.99) 275.06,-1137.99 275.06,-449.02 ccw(c225.85,-449.02)
NetJ1_2 on Bottom Layer "NETJ1_2_L02_P111" (solid, pour order 111): 1771.65,-340.75 -108.8,-340.75 cw(c-108.8,-291.54) -158.01,-291.54 -158.01,121.85 cw(c-108.8,121.85) -108.8,171.06 1771.65,171.06

## Other copper
Top Layer:
  text "ArtB '17" at 904.91,-2493.76 h40
Multi-Layer:
  lines w100 net 60HzAnt: 990.39,-1346.49 1719.62,-1350.46

## Silkscreen, mask and mechanical layers (free items; w line width, h text height)
Top Overlay:
  drawing of 3143 lines, arcs and shapes, not listed
  text "R1 / OUT" at 1099.59,2082.96 h100
  text "R1 / IN" at 1099.59,1510.94 h100
  text "R2 / OUT" at 1099.59,917.11 h100
  text "R2 / IN" at 1111.22,350.59 h100
  text "AC_N" at 1286.28,-126.52 h100
  text "AC_L" at 1286.28,-689.08 h100
  text "ArtB '17" at 902.09,-2493.97 h40
  text "RelayBoard / Rev A" at -286.88,-2545.11 h60

## Text inside footprints (layer, text, board x,y; h text height)
P1: Mechanical 1 "11.37MM / FROM / CENTER" at -88,-2560.15 h39.37 r270